# Altium PCB NBP8 Xilinx Virtex-II Pro BGA456 Rev1.01.PcbDoc (part 3 of 4)
Units mm, origin at the board's own origin, x right, y up, seen from the top; angles counter-clockwise.
Board outline 69 x 99.5 mm, 8 copper layers (Top Layer, InternalPlane1, InternalPlane2, MidLayer1, MidLayer2, MidLayer3, MidLayer4, Bottom Layer), stack 1.545 mm thick; 164 components, 314 nets, 1132 pads, 807 vias.
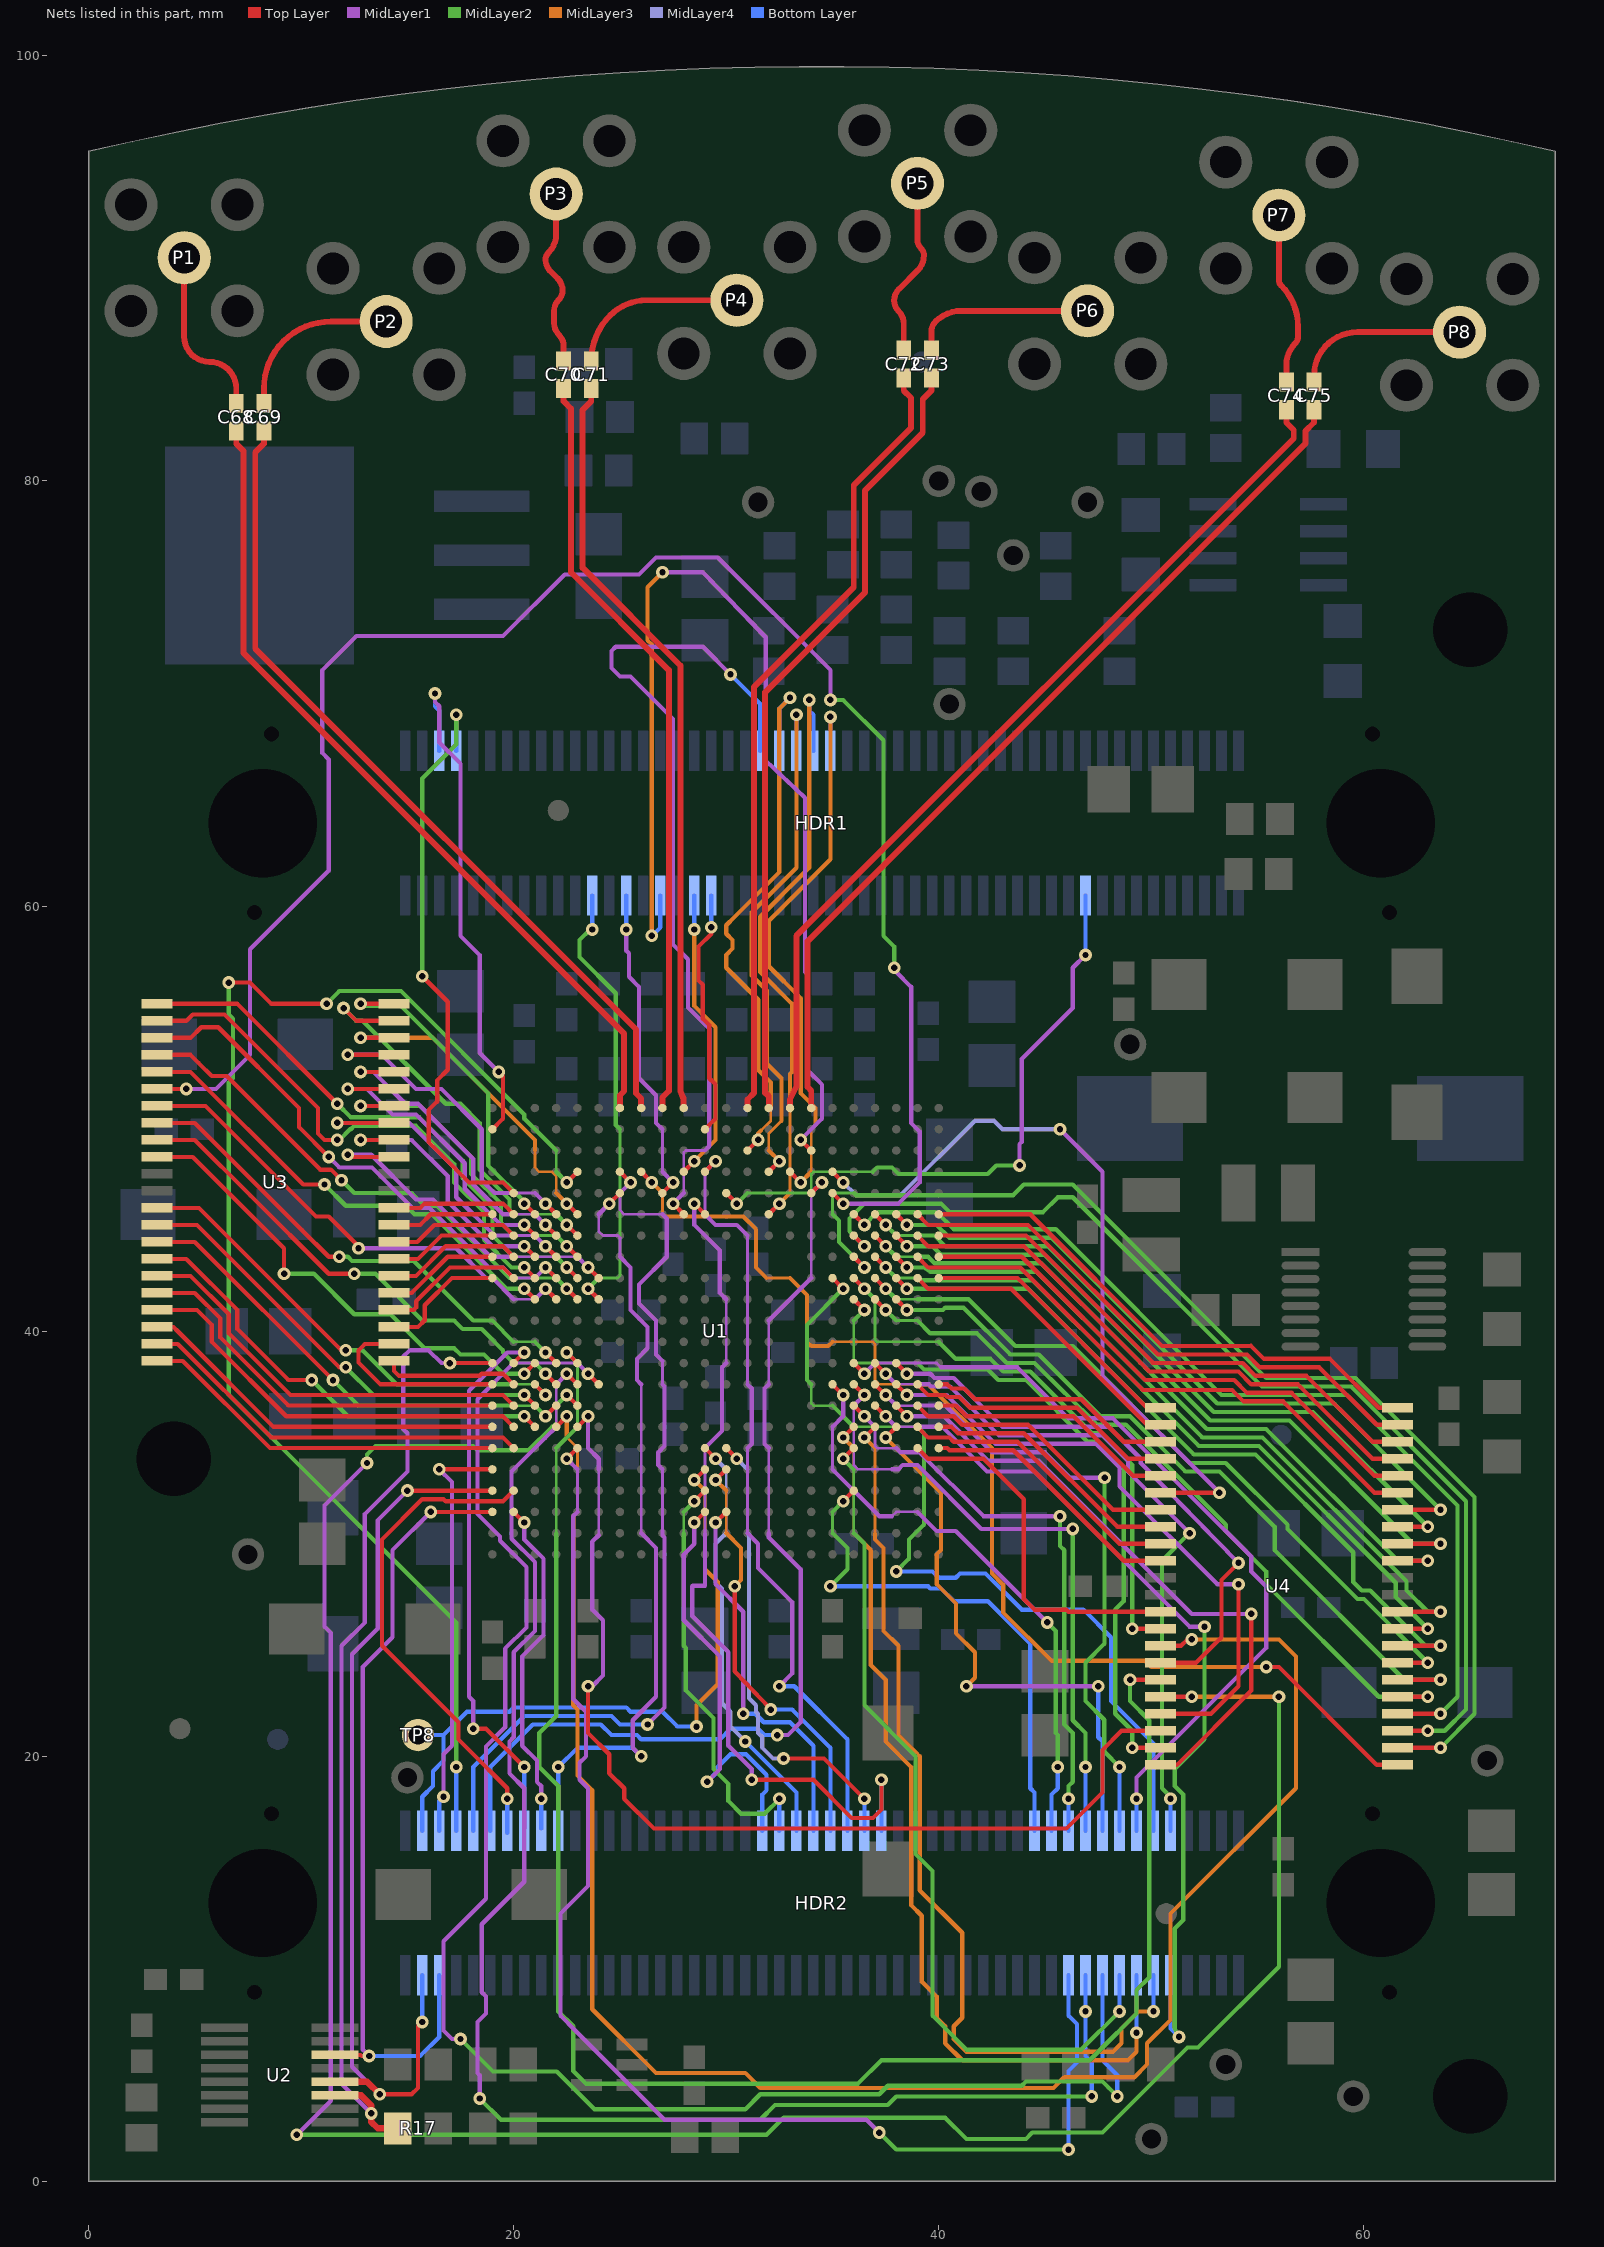
[diagram p9: the nets of this part, all layers, seen from the top]

## Via types
v1: diameter 0.6, hole 0.3, Top Layer to Bottom Layer, tented bottom, 695 vias
v2: diameter 0.9, hole 0.5, Top Layer to Bottom Layer, tented bottom, 45 vias
v3: diameter 1.8, hole 1, Top Layer to Bottom Layer, tented bottom, 26 vias
v4: diameter 1, hole 0.7, Top Layer to Bottom Layer, tented bottom, 17 vias
v5: diameter 1, hole 0.5, Top Layer to Bottom Layer, tented bottom, 15 vias
v6: diameter 1.5, hole 1, Top Layer to Bottom Layer, tented bottom, 4 vias
v7: diameter 0.8, hole 0.4, Top Layer to Bottom Layer, tented bottom, 3 vias
v8: diameter 0.9, hole 0.5, Top Layer to Bottom Layer, 2 vias

## Nets (pads, with @x,y where several pads share a name; then routed paths per layer and width w, separated by ;. In a path a pad name is that pad's centre, name@x,y a point inside that pad or via, vN(x,y) a via of type N, cw(c..) or ccw(c..) an arc to the next point about the centre after c; other vN are vias at no path point) (continued)
RAM_ADDR13: HDR1.35 U1.W13 | length 14
  Top Layer w0.2: U1.W13@28,47.5 v1(28.5,48)
  MidLayer3 w0.2: v1(28.5,48) 29.5,49 29.5,54.3 28.5,55.3 v1(28.5,58.9)
  Bottom Layer w0.2: v1(28.5,58.9) 28.5,59.1 HDR1.35@28.5,60.5
RAM_ADDR14: HDR1.31 U1.Y7 | length 51.6
  Top Layer w0.2: v1(33.5,49) U1.Y7@34,48.5
  MidLayer1 w0.2: v1(27,75.7) 28.9,75.7 31.855,72.645 31.855,66.845 33.7,65.1 33.7,56.9 33.8,56.8 33.8,52.3 34.5,51.6 34.5,50 v1(33.5,49)
  MidLayer3 w0.2: v1(26.5,58.6) 26.5,72.3 26.3,72.5 26.3,75 26.8,75.5 v1(27,75.7)
  Bottom Layer w0.2: v1(26.5,58.6) 26.9,59 HDR1.31@26.9,60.5
RAM_ADDR15: HDR1.27 U1.V14 | length 15.1
  Top Layer w0.2: U1.V14@27,46.5 v1(27.5,47)
  MidLayer1 w0.127: 27,47.5 27,49.5
  MidLayer1 w0.2: v1(25.3,58.9) 25.3,57.9 25.422,57.778 25.422,56.678 25.9,56.2 25.9,51.9 26.7,51.1 26.7,49.8 27,49.5 ; 27,47.5 v1(27.5,47)
  Bottom Layer w0.2: v1(25.3,58.9) HDR1.27@25.3,60.5
RAM_ADDR16: HDR1.23 U1.N17 | length 21.4
  Top Layer w0.2: v1(23.5,42) U1.N17@24,41.5
  MidLayer2 w0.127: 24,42.5 24.9,42.5 25,42.6 25,49.5
  MidLayer2 w0.2: v1(23.5,42) 24,42.5 ; v1(23.7,58.9) 23.6,58.9 23.1,58.4 23.1,57.6 24.8,55.9 24.8,49.7 25,49.5
  Bottom Layer w0.2: v1(23.7,58.9) HDR1.23@23.7,60.5
RAM_CS: HDR1.37 U1.AA12 | length 12
  Top Layer w0.2: U1.AA12@29,49.5 29.5,50 29.5,51.6 29.2,51.9 29.2,54.4 28.9,54.7 28.9,56.3 28.7,56.5 28.7,58.1 29.3,58.7 v1(29.3,59)
  Bottom Layer w0.2: v1@29.3,58.8 v1(29.3,59) HDR1.37@29.3,60.5
RED0: HDR1.6 U1.AA22 | length 24.8
  Top Layer w0.2: U1.AA22@19,49.5 19.5,50 19.5,52 v1(19.3,52.2)
  MidLayer1 w0.2: v1(16.3,70) 16.3,69.6 16.5,69.4 16.5,67.7 17.5,66.7 17.5,58.6 18.4,57.7 18.4,53.1 v1(19.3,52.2)
  Bottom Layer w0.2: v1(16.3,70) 16.3,69.4 16.5,69.2 HDR1.6@16.5,67.3
RED1: HDR1.8 U1.V21 | length 28.3
  Top Layer w0.2: v1(15.7,56.7) 16.9,55.5 16.9,52.3 16.4,51.8 16.4,50.8 16,50.4 16,48.9 17.9,47 19.5,47 U1.V21@20,46.5
  MidLayer2 w0.2: v1(15.7,56.7) 15.7,66 17.3,67.6 v1(17.3,69)
  Bottom Layer w0.2: HDR1.8@17.3,67.3 v1(17.3,69)
REF_CLK: HDR2.4 TP8.1 U1.E12 | length 32.1
  Top Layer w0.2: v1(28.5,33) U1.E12@29,33.5
  MidLayer3 w0.127: 29,30.5 29,32.5
  MidLayer3 w0.2: v1(28.5,33) 29,32.5 ; v1(28.6,21.4) 28.6,22.4 29.6,23.4 29.6,28.2 29,28.8 29,30.5
  Bottom Layer w0.2: TP8.1@15.5,21 16.7,21 ; HDR2.4@15.7,16.5 15.7,18.1 16.2,18.6 16.2,19.3 16.7,19.8 16.7,21 ; v1(28.6,21.4) 27.7,21.4 27,22.1 25.5,22.1 25.3,22.3 20,22.3 19.8,22.1 17.8,22.1 16.7,21
RX0N: C68.2 P1.1 | length 8.2
  Top Layer w0.279: P1.1@4.5,90.5 4.5,86.8 ccw(c5.7,86.8) 5.7,85.6 cw(c5.7,84.35) 6.95,84.35 C68.2@6.95,83.65
RX0P: C69.2 P2.1 | length 8.2
  Top Layer w0.279: C69.2@8.25,83.65 8.25,84.35 cw(c11.4,84.35) 11.4,87.5 P2.1@14,87.5
RX1N: C72.2 P5.1 | length 8.6
  Top Layer w0.279: C72.2@38.35,86.15 38.35,87.396 ccw(c37.496,87.396) 38.1,88 cw(c38.583,88.483) 37.9,88.483 cw(c38.666,88.483) 38.124,89.024 39.005,89.905 ccw(c38.293,90.617) 39.3,90.617 ccw(c38.859,90.617) 39.171,90.929 cw(c39.583,91.341) 39,91.341 P5.1@39,94
RX1P: C73.2 P6.1 | length 8.7
  Top Layer w0.279: C73.2@39.65,86.15 39.65,87.017 cw(c40.333,87.017) 39.85,87.5 cw(c41.057,86.293) 41.057,88 P6.1@47,88
SCL: HDR2.5 U1.C22 U2.14 | length 38.1
  Top Layer w0.2: U2.14@11.6,5.953 12.798,5.953 12.85,5.9 v1(13.2,5.9) ; v1(16.1,31.5) 16.9,31.5 U1.C22@19,31.5
  MidLayer1 w0.2: v1(13.2,5.9) 12.9,6.2 12.9,24.2 14.3,25.6 14.3,29.7 v1(16.1,31.5)
  Bottom Layer w0.2: v1(13.2,5.9) 15.6,5.9 16.5,6.8 HDR2.5@16.5,9.7
SDA: HDR2.3 U1.D22 U2.12 | length 43.7
  Top Layer w0.2: v1(13.7,4.1) 15.2,4.1 15.5,4.4 15.5,7.3 v1(15.7,7.5) ; v1(15,32.5) U1.D22@19,32.5
  Top Layer w0.3: U2.12@11.6,4.683 13.117,4.683 v1(13.7,4.1)
  MidLayer1 w0.2: v1(13.7,4.1) 12.4,5.4 12.4,24.8 13.6,26 13.6,31.1 v1(15,32.5)
  Bottom Layer w0.2: v1(15.7,7.5) HDR2.3@15.7,9.7
SP0: HDR2.79 U1.F18 | length 63.3
  Top Layer w0.2: v1(22.5,34) U1.F18@23,34.5
  MidLayer1 w0.127: 23,31.5 23,33.5
  MidLayer1 w0.2: v1(22.5,34) 23,33.5 ; 23,31.5 22.8,31.3 22.8,22.7 23.4,22.1 23.4,20 23.1,19.7 23.1,18.9 23.5,18.5 23.5,13.9 22.2,12.6 22.2,7.8 22.9,7.1 27.1,2.9 36.6,2.9 v1(37.2,2.3)
  MidLayer2 w0.2: v1(37.2,2.3) 38,1.5 v1(46.1,1.5)
  Bottom Layer w0.2: v1(46.1,1.5) 46.1,5.2 ; 46.1,5.2 46.5,5.6 46.5,7.4 46.1,7.8 HDR2.79@46.1,9.7
SP1: HDR2.81 U1.J18 | length 73.7
  Top Layer w0.2: v1(22.5,38) U1.J18@23,37.5
  MidLayer1 w0.127: 22,35.5 22,37.5
  MidLayer1 w0.2: v1(18.4,3.9) 18.4,5 18.3,5.1 18.3,7.5 18.7,7.9 18.7,8.7 18.5,8.9 18.5,12.1 20.5,14.1 20.5,18.5 19.8,19.2 19.8,20.7 20,20.9 20,24.9 21,25.9 21,29.134 19.9,30.234 19.9,33.4 21.493,34.993 22,35.5 ; 22,37.5 v1(22.5,38)
  MidLayer2 w0.2: v1(18.4,3.9) 19.4,2.9 31.6,2.9 32.3,3.6 37.6,3.6 38,4 v1(47.2,4)
  Bottom Layer w0.2: HDR2.81@46.9,9.7 v1(46.9,8) 46.9,5.9 47.2,5.6 v1(47.2,4)
SP2: HDR2.83 U1.J17 | length 79.1
  Top Layer w0.2: v1(23.5,38) U1.J17@24,37.5
  MidLayer1 w0.127: 20,38.5 23,38.5
  MidLayer1 w0.2: v1(17.5,6.7) 17.1,6.7 16.7,7.1 16.7,11.3 18.7,13.3 18.7,20.466 19.6,21.366 19.6,25.066 20.6,26.066 20.6,28.9 19.357,30.143 19.357,30.343 18.3,31.4 18.3,36.8 20,38.5 ; 23,38.5 v1(23.5,38)
  MidLayer2 w0.2: v1(17.5,6.7) 19.03,5.17 22.03,5.17 23.8,3.4 30.9,3.4 31.6,4.1 37.2,4.1 37.6,4.5 43.9,4.5 44.1,4.7 47.7,4.7 48,4.4 v1(48.4,4)
  Bottom Layer w0.2: HDR2.83@47.7,9.7 47.7,7 47.7,5.7 48.4,5 v1(48.4,4)
SP3: HDR2.85 U1.F5 | length 40.6
  Top Layer w0.2: v1(35.5,34) U1.F5@36,34.5
  MidLayer2 w0.127: 36,30.5 36,33.5
  MidLayer2 w0.2: v1(35.5,34) 36,33.5 ; 36,30.5 36.5,30 36.5,22.4 38.9,20 38.9,15.4 39.7,14.6 39.7,7.8 41.3,6.2 46.7,6.2 v1(48.5,8)
  Bottom Layer w0.2: v1(48.5,8) HDR2.85@48.5,9.7
SP4: HDR2.87 U1.G5 | length 44.3
  Top Layer w0.2: v1(35.5,35) U1.G5@36,35.5
  MidLayer3 w0.127: 36,30.5 36,34.5
  MidLayer3 w0.2: v1(35.5,35) 36,34.5 ; 36,30.5 36.8,29.7 36.8,24.3 37.502,23.598 37.502,20.698 38.7,19.5 38.7,13 39.2,12.5 39.2,12 39.2,9.4 39.9,8.7 39.9,7.7 40.3,7.3 40.3,6.5 41.1,5.7 48.9,5.7 49.3,6.1 v1(49.3,7)
  Bottom Layer w0.2: v1(49.3,7) HDR2.87@49.3,9.7
SP5: HDR2.89 U1.G4 | length 43.6
  Top Layer w0.2: v1(36.5,35) U1.G4@37,35.5
  MidLayer3 w0.127: 37,30.5 37,34.5
  MidLayer3 w0.2: v1(36.5,35) 37,34.5 ; 37,30.5 37,30.2 37.4,29.8 37.4,25.9 38.1,25.2 38.1,21 38.894,20.206 39.1,20 39.1,13.7 41.1,11.7 41.1,7.7 40.7,7.3 40.7,6.7 41.3,6.1 48.2,6.1 48.6,6.5 48.6,7.2 49.4,8 v1(50.1,8)
  Bottom Layer w0.2: v1(50.1,8) HDR2.89@50.1,9.7
SP6: HDR2.91 U1.H4 | length 43.1
  Top Layer w0.2: U1.H4@37,36.5 v1(37.5,36)
  MidLayer1 w0.127: 38,35.5 39,35.5
  MidLayer1 w0.2: v1(37.5,36) 38,35.5 ; 39,35.5 40.172,35.5 42.272,33.4 44.5,33.4 51.8,26.1 v1(52.5,26.1)
  MidLayer2 w0.2: v1(51.3,6.8) 51.1,7.2 51.1,11.9 51.5,12.3 51.5,18.2 51.1,18.6 51.1,19.4 52.5,20.8 v1(52.5,26.1)
  Bottom Layer w0.2: HDR2.91@50.9,9.7 50.9,7.2 v1(51.3,6.8)
SP7: HDR2.92 U1.K4 | length 33.1
  Top Layer w0.2: U1.K4@37,38.5 v1(37.5,38)
  MidLayer1 w0.127: 38,37.5 39,37.5
  MidLayer1 w0.2: v1(37.5,38) 38,37.5 ; 39,37.5 39.534,37.5 39.634,37.4 40.534,37.4 42.834,35.1 47.7,35.1 48.9,33.9 48.9,33.4 v1(51.8,30.5)
  MidLayer2 w0.2: v1(50.9,18) 50.9,18.1 50.5,18.5 50.5,29.2 v1(51.8,30.5)
  Bottom Layer w0.2: HDR2.92@50.9,16.5 v1(50.9,18)
SP8: HDR2.90 U1.P6 | length 41.3
  Top Layer w0.2: U1.P6@35,42.5 v1(35.5,42)
  MidLayer2 w0.127: 34,37.5 34,36.6 34.1,36.5 35,36.5 ; 36,35.5 39,35.5
  MidLayer2 w0.2: 34,37.5 33.8,37.7 33.8,40.3 v1(35.5,42) ; 35,36.5 36,35.5 ; v1(38,28.7) 38.6,29.3 38.6,30.2 39.3,30.9 39.3,35.2 39,35.5
  Bottom Layer w0.2: v1(38,28.7) 39.7,28.7 40,28.4 40.8,28.4 41,28.6 42.2,28.6 43.9,26.9 46.8,26.9 48.1,25.6 48.1,22.6 50.1,20.6 50.1,18.7 HDR2.90@50.1,16.5
SP9: HDR2.88 U1.K5 | length 38.6
  Top Layer w0.2: U1.K5@36,38.5 v1(36.5,38)
  MidLayer1 w0.127: 37,38.5 39.9,38.5 40.1,38.3
  MidLayer1 w0.2: v1(36.5,38) 37,38.5 ; 40.1,38.3 43.7,38.3 46.1,35.9 48.2,35.9 52.2,31.9 54.7,29.4 54.7,28.7 55.4,28 55.4,25.1 49.3,19 v1(49.3,18)
  Bottom Layer w0.2: HDR2.88@49.3,16.5 v1(49.3,18)
SP10: HDR2.86 U1.J4 | length 30.3
  Top Layer w0.2: U1.J4@37,37.5 v1(37.5,37)
  MidLayer1 w0.127: 38,36.5 39,36.5
  MidLayer1 w0.2: v1(37.5,37) 38,36.5 ; 39,36.5 40.303,36.5 42.503,34.3 45,34.3 46.2,33.1 v1(47.8,33.1)
  MidLayer2 w0.2: v1(47.8,33.1) 47.8,25.3 46.9,24.4 46.9,22.6 47.781,21.719 47.781,20.219 v1(48.5,19.5)
  Bottom Layer w0.2: HDR2.86@48.5,16.5 v1(48.5,19.5)
SP11: HDR2.84 U1.G3 | length 27.6
  Top Layer w0.2: v1(37.5,35) U1.G3@38,35.5
  MidLayer1 w0.2: v1(41.3,23.3) v1(47.5,23.3)
  MidLayer3 w0.2: v1(37.5,35) 39.4,33.1 40.1,32.4 40.1,29.7 39.9,29.5 39.9,28.1 40.1,27.9 40.814,27.186 40.814,25.786 41.7,24.9 41.7,23.7 v1(41.3,23.3)
  Bottom Layer w0.2: v1(47.5,23.3) 47.5,20.9 47.7,20.7 47.7,18 HDR2.84@47.7,16.5
SP12: HDR2.82 U1.J5 | length 30.4
  Top Layer w0.2: U1.J5@36,37.5 v1(36.5,37)
  MidLayer1 w0.127: 36,36.5 36,33.7 36.2,33.5 37.8,33.5
  MidLayer1 w0.2: 36,36.5 v1(36.5,37) ; 37.8,33.5 38.1,33.5 38.3,33.7 39,33.7 42,30.7 v1(46.3,30.7)
  MidLayer2 w0.2: v1(46.3,30.7) 46.3,21.7 46.9,21.1 v1(46.9,19.5)
  Bottom Layer w0.2: HDR2.82@46.9,16.5 v1(46.9,19.5)
SP13: HDR2.80 U1.H5 | length 27.5
  Top Layer w0.2: U1.H5@36,36.5 v1(36.5,36)
  MidLayer1 w0.127: 37,35.5 37,34.6 37.1,34.5 38,34.5
  MidLayer1 w0.2: v1(36.5,36) 37,35.5 ; 38,34.5 38.2,34.3 39.1,34.3 42.1,31.3 v1(45.7,31.3)
  MidLayer2 w0.2: v1(45.7,31.3) 45.7,29.9 45.9,29.7 45.9,21.5 46.3,21.1 46.3,18.8 46.1,18.6 v1(46.1,18)
  Bottom Layer w0.2: HDR2.80@46.1,16.5 v1(46.1,18)
SP14: HDR2.78 U1.J6 | length 27.8
  Top Layer w0.2: U1.J6@35,37.5 v1(35.5,37)
  MidLayer1 w0.127: 35,33.5 35,35.5 ; 37.8,31.3 38,31.5 39,31.5
  MidLayer1 w0.2: 35,33.5 37.2,31.3 37.8,31.3 ; 35,35.5 35.5,36 v1(35.5,37) ; 39,31.5 39.9,30.6 40.8,30.6 43.6,27.8 v1(45.1,26.3)
  MidLayer2 w0.2: v1(45.1,26.3) 45.5,25.9 45.5,21.1 45.6,21 v1(45.6,19.5)
  Bottom Layer w0.2: HDR2.78@45.3,16.5 45.3,18.2 45.6,18.5 v1(45.6,19.5)
SP15: HDR2.76 U1.D5 | length 24.9
  Top Layer w0.2: v1(35.5,32) U1.D5@36,32.5
  MidLayer2 w0.127: 35,30.5 35,31.5
  MidLayer2 w0.2: v1(34.9,28) 35.7,28.8 35.7,29.8 35,30.5 ; 35,31.5 v1(35.5,32)
  Bottom Layer w0.2: v1(34.9,28) 39.5,28 39.6,27.9 40.1,27.9 40.7,27.3 42.3,27.3 44.3,25.3 44.3,18.5 44.5,18.3 HDR2.76@44.5,16.5
SPI_CLK: HDR1.46 U1.Y10 | length 26.8
  Top Layer w0.2: U1.Y10@31,48.5 v1(31.5,49)
  MidLayer3 w0.127: 31.637,49.437 32.1,49.9 32.1,50.5
  MidLayer3 w0.2: v1(31.5,49) 31.5,49.3 31.637,49.437 ; 32.1,50.5 32.1,51.7 31.506,52.294 31.506,55.594 30,57.1 30,57.7 30.3,58 30.3,58.4 30,58.7 30,59.1 30.386,59.486 32.5,61.6 32.5,69.3 v1(33,69.8)
  Bottom Layer w0.2: HDR1.46@32.5,67.3 32.5,69.3 v1(33,69.8)
SPI_DIN: HDR1.44 U1.U13 | length 40.5
  Top Layer w0.2: v1(27.5,46) U1.U13@28,45.5
  MidLayer1 w0.127: 28,46.5 28,48.4 28.1,48.5 29,48.5
  MidLayer1 w0.2: v1(27.5,46) 28,46.5 ; 29,48.5 29.2,48.7 29.2,54.234 28.2,55.234 28.2,57.5 27.5,58.2 27.5,68.8 25.5,70.8 25,70.8 24.6,71.2 24.6,72 24.8,72.2 28.9,72.2 v1(30.2,70.9)
  Bottom Layer w0.2: v1(30.2,70.9) 30.7,70.4 31.6,69.5 HDR1.44@31.6,67.3
SPI_DOUT: HDR1.50 U1.U9 | length 28.7
  Top Layer w0.2: U1.U9@32,45.5 v1(32.5,46)
  MidLayer3 w0.127: 33,46.5 33,50.5
  MidLayer3 w0.2: v1(32.5,46) 33,46.5 ; 33,50.5 33,52.1 33.1,52.2 33.1,55.4 31.6,56.9 31.6,59.5 33.5,61.4 33.9,61.8 v1(33.9,69.7)
  Bottom Layer w0.2: v1(33.9,69.7) 33.9,69.2 34.1,69 HDR1.50@34.1,67.3
SPI_MODE: HDR1.52 U1.W8 | length 26.7
  Top Layer w0.2: U1.W8@33,47.5 v1(33.5,47)
  MidLayer3 w0.127: 34,47.5 34,49.5
  MidLayer3 w0.2: v1(33.5,47) 34,47.5 ; 34,49.5 34.2,49.7 34.2,50.5 33.5,51.2 33.5,55.669 32,57.169 32,59.3 34.9,62.2 v1(34.9,68.9)
  Bottom Layer w0.2: HDR1.52@34.9,67.3 v1(34.9,68.9) v1@34.9,69
SPI_SEL: HDR1.48 U1.W9 | length 25.3
  Top Layer w0.2: U1.W9@32,47.5 v1(32.5,48)
  MidLayer3 w0.127: 32,48.5 32,49.3 32.6,49.9
  MidLayer3 w0.2: 32,48.5 v1(32.5,48) ; 32.6,49.9 32.6,51.9 31.906,52.594 31.906,56.028 31.2,56.734 31.2,59.7 33.3,61.8 v1(33.3,69)
  Bottom Layer w0.2: HDR1.48@33.3,67.3 v1(33.3,69)
SRAM0_A0: U1.N20 U3.5 | length 22.2
  Top Layer w0.2: U3.5@3.225,52.2 4.8,52.2 10.1,46.9 v1(11.1,46.9) ; v1(20.5,42) U1.N20@21,41.5
  MidLayer2 w0.2: v1(11.1,46.9) 12.1,45.9 14.934,45.9 15.334,45.5 16.166,45.5 19.666,42 v1(20.5,42)
SRAM0_A1: U1.N18 U3.4 | length 24.5
  Top Layer w0.2: U3.4@3.225,53 4.8,53 5.2,52.6 5.799,52.001 6.499,52.001 10.9,47.6 11.4,47.6 v1(11.9,47.1) ; v1(22.5,42) U1.N18@23,41.5
  MidLayer2 w0.127: 19.8,42.5 22,42.5
  MidLayer2 w0.2: v1(11.9,47.1) 12.5,46.5 15.2,46.5 15.8,45.9 16.4,45.9 19.8,42.5 ; 22,42.5 v1(22.5,42)
SRAM0_A2: U1.P19 U3.3 | length 24.8
  Top Layer w0.2: U3.3@3.225,53.8 3.9,53.8 4.8,53.8 5.3,54.3 6.1,54.3 9.9,50.5 9.9,49.6 v1(11.3,48.2) ; v1(21.5,43) U1.P19@22,42.5
  MidLayer1 w0.127: 20,42.5 21,42.5
  MidLayer1 w0.2: v1(11.3,48.2) 11.8,47.7 13.334,47.7 15.234,45.8 16.034,45.8 18.834,43 19.5,43 20,42.5 ; 21,42.5 v1(21.5,43)
SRAM0_A3: U1.P20 U3.2 | length 25.6
  Top Layer w0.2: U3.2@3.225,54.6 4.6,54.6 4.9,54.9 6.4,54.9 10.8,50.5 10.8,49.3 11.1,49 v1(11.7,49) ; v1(20.5,43) U1.P20@21,42.5
  MidLayer2 w0.2: v1(11.7,49) 11.8,49 12.3,49.5 12.334,49.5 12.495,49.66 15.408,49.66 17.2,47.869 17.2,47 18.6,45.6 18.6,44.3 19.9,43 v1(20.5,43)
SRAM0_A4: U1.P18 U3.1 | length 26.4
  Top Layer w0.2: U3.1@3.225,55.4 7,55.4 v1(11.7,50.7) ; v1(22.5,43) U1.P18@23,42.5
  MidLayer2 w0.127: 20,43.5 22,43.5
  MidLayer2 w0.2: v1(11.7,50.7) 12.34,50.06 15.574,50.06 17.6,48.034 17.6,47.2 19,45.8 19,44.5 20,43.5 ; 22,43.5 v1(22.5,43)
SRAM0_A5: U1.U20 U3.44 | length 15.9
  Top Layer w0.2: v1(12.8,55.4) U3.44@14.375,55.4 ; v1(20.5,46) U1.U20@21,45.5
  MidLayer2 w0.2: v1(12.8,55.4) 12.9,55.3 14.7,55.3 18.8,51.2 18.8,47.8 20.5,46.1 v1(20.5,46)
SRAM0_A6: U1.T18 U3.43 | length 19.6
  Top Layer w0.2: v1(12,55.2) 12.6,54.6 U3.43@14.375,54.6 ; v1(22.5,45) U1.T18@23,44.5
  MidLayer2 w0.127: 20,45.5 22,45.5
  MidLayer2 w0.2: v1(12,55.2) 12.6,54.6 12.9,54.6 16.802,50.698 17.502,50.698 18.4,49.8 18.4,47.6 19.8,46.2 19.8,45.7 20,45.5 ; 22,45.5 v1(22.5,45)
SRAM0_A7: U1.U18 U3.42 | length 16.4
  Top Layer w0.2: v1(12.8,53.8) U3.42@14.375,53.8 ; v1(22.5,46) U1.U18@23,45.5
  MidLayer3 w0.127: 21,48.5 21,47.7 21.2,47.5 21.8,47.5 22,47.3 22,46.5
  MidLayer3 w0.2: v1(12.8,53.8) 16.2,53.8 21,49 21,48.5 ; 22,46.5 v1(22.5,46)
SRAM0_A8: U1.H22 U3.18 | length 18.5
  Top Layer w0.2: U3.18@3.225,41.8 5,41.8 6.2,40.6 6.2,39.7 9.4,36.5 U1.H22@19,36.5
SRAM0_A9: U1.R22 U3.27 | length 5.3
  Top Layer w0.2: U3.27@14.375,41.8 15.2,41.8 16.9,43.5 U1.R22@19,43.5
SRAM0_A10: U1.P21 U3.26 | length 6.8
  Top Layer w0.2: U3.26@14.375,41 15.3,41 15.413,41.113 15.413,41.413 17,43 19.5,43 U1.P21@20,42.5
SRAM0_A11: U1.P22 U3.25 | length 6
  Top Layer w0.2: U3.25@14.375,40.2 15.5,40.2 15.819,40.519 15.819,41.219 17.1,42.5 U1.P22@19,42.5
SRAM0_A12: U1.J22 U3.24 | length 9.1
  Top Layer w0.2: U3.24@14.375,39.4 13,39.4 12.7,39.1 12.7,38.531 13.731,37.5 U1.J22@19,37.5
SRAM0_A13: U1.J21 U3.23 | length 6.4
  Top Layer w0.2: U3.23@14.375,38.6 14.375,38.125 14.6,37.9 18.4,37.9 18.5,38 19.5,38 U1.J21@20,37.5
SRAM0_A14: U1.F22 U3.22 | length 17.5
  Top Layer w0.2: U3.22@3.225,38.6 4.434,38.6 8.534,34.5 U1.F22@19,34.5
SRAM0_A15: U1.F21 U3.21 | length 18.8
  Top Layer w0.2: U3.21@3.225,39.4 4.2,39.4 8.6,35 19.5,35 U1.F21@20,34.5
SRAM0_A16: U1.G22 U3.20 | length 17.7
  Top Layer w0.2: U3.20@3.225,40.2 4,40.2 4.2,40 4.6,39.6 8.7,35.5 U1.G22@19,35.5
SRAM0_A17: U1.G21 U3.19 | length 19.5
  Top Layer w0.2: U3.19@3.225,41 5.1,41 5.8,40.3 5.8,39.5 9.3,36 19.5,36 U1.G21@20,35.5
SRAM0_A18: U1.R21 U3.28 | length 6.4
  Top Layer w0.2: U3.28@14.375,42.6 15.4,42.6 16.8,44 19.5,44 U1.R21@20,43.5
SRAM0_D0: U1.N19 U3.7 | length 23.3
  Top Layer w0.2: U3.7@2.9,50.6 U3.7@3.225,50.6 5.5,50.6 10.7,45.4 11.3,45.4 12.7,44 v1(12.7,43.9) ; v1(21.5,42) U1.N19@22,41.5
  MidLayer1 w0.127: 20,41.5 21,41.5
  MidLayer1 w0.2: v1(12.7,43.9) 17.3,43.9 18.7,42.5 19,42.5 20,41.5 ; 21,41.5 v1(21.5,42)
SRAM0_D1: U1.K19 U3.8 | length 23.5
  Top Layer w0.2: U3.8@3.225,49.8 5,49.8 10.025,44.775 11.3,43.5 v1(11.8,43.5) ; v1(21.5,39) U1.K19@22,38.5
  MidLayer2 w0.127: 20,39.5 21,39.5
  MidLayer2 w0.2: v1(11.8,43.5) 12.2,43.5 12.4,43.3 15.3,43.3 18.1,40.5 19,40.5 20,39.5 ; 21,39.5 v1(21.5,39)
SRAM0_D2: U1.J19 U3.9 | length 23.6
  Top Layer w0.2: U3.9@3.225,49 5,49 7.6,46.4 11.3,42.7 v1(12.5,42.7) ; v1(21.5,38) U1.J19@22,37.5
  MidLayer2 w0.127: 20,38.5 21,38.5
  MidLayer2 w0.2: v1(12.5,42.7) 13.5,42.7 15.7,40.5 17.2,40.5 17.6,40.1 18.5,40.1 19.5,39.1 19.5,39 20,38.5 ; 21,38.5 v1(21.5,38)
SRAM0_D3: U1.K20 U3.10 | length 22.9
  Top Layer w0.2: U3.10@3.225,48.2 4.9,48.2 5.7,47.4 9.2,43.9 v1(9.2,42.7) ; v1(20.5,38) U1.K20@21,38.5
  MidLayer2 w0.2: v1(9.2,42.7) 10.6,42.7 12.5,40.8 14.2,40.8 15.8,39.2 17.2,39.2 17.5,38.9 18.6,38.9 19.5,38 v1(20.5,38)
SRAM0_D4: U1.J20 U3.13 | length 22.6
  Top Layer w0.2: U3.13@3.225,45.8 5.2,45.8 11.9,39.1 v1(12.1,39.1) ; U1.J20@21,37.5 v1(21.5,37)
  MidLayer2 w0.127: 20,37.5 21,37.5
  MidLayer2 w0.2: v1(12.1,39.1) 12.9,39.1 14.5,37.5 20,37.5 ; 21,37.5 v1(21.5,37)
SRAM0_D5: U1.H20 U3.14 | length 21.3
  Top Layer w0.2: U3.14@3.225,45 5.1,45 11.8,38.3 v1(12.1,38.3) ; v1(20.5,37) U1.H20@21,36.5
  MidLayer2 w0.2: v1(12.1,38.3) 13.4,37 v1(20.5,37)
SRAM0_D6: U1.H19 U3.15 | length 22.4
  Top Layer w0.2: U3.15@3.225,44.2 5,44.2 v1(11.5,37.7) ; v1(21.5,36) U1.H19@22,36.5
  MidLayer2 w0.127: 20,36.5 21,36.5
  MidLayer2 w0.2: v1(11.5,37.7) 12.7,36.5 20,36.5 ; 21,36.5 v1(21.5,36)
SRAM0_D7: U1.G20 U3.16 | length 21.6
  Top Layer w0.2: U3.16@3.225,43.4 4.6,43.4 7,41 7,40.1 9.4,37.7 v1(10.5,37.7) ; v1(20.5,36) U1.G20@21,35.5
  MidLayer2 w0.2: v1(10.5,37.7) 12.2,36 v1(20.5,36)
SRAM0_D8: U1.T22 U3.29 | length 5.1
  Top Layer w0.2: U3.29@14.375,43.4 15.5,43.4 16.6,44.5 U1.T22@19,44.5
SRAM0_D9: U1.T21 U3.30 | length 6.2
  Top Layer w0.2: U3.30@14.375,44.2 15.466,44.2 16.266,45 19.5,45 U1.T21@20,44.5
SRAM0_D10: U1.U22 U3.31 | length 4.8
  Top Layer w0.2: U3.31@14.375,45 15.6,45 16.1,45.5 U1.U22@19,45.5
SRAM0_D11: U1.U21 U3.32 | length 5.9
  Top Layer w0.2: U3.32@14.375,45.8 15.6,45.8 15.8,46 19.5,46 U1.U21@20,45.5
SRAM0_D12: U1.P17 U3.35 | length 16.5
  Top Layer w0.2: v1(12.2,48.3) 12.2,48.2 U3.35@14.375,48.2 ; v1(23.5,43) U1.P17@24,42.5
  MidLayer1 w0.127: 20,43.5 23,43.5
  MidLayer1 w0.2: v1(12.2,48.3) 13.3,48.3 15.4,46.2 16.2,46.2 18.9,43.5 20,43.5 ; 23,43.5 v1(23.5,43)
SRAM0_D13: U1.R20 U3.36 | length 12.8
  Top Layer w0.2: v1(12.8,49) U3.36@14.375,49 ; v1(20.5,44) U1.R20@21,43.5
  MidLayer1 w0.2: v1(12.8,49) 15.2,49 16.9,47.3 16.9,46.1 19,44 v1(20.5,44)
SRAM0_D14: U1.R19 U3.37 | length 16.3
  Top Layer w0.2: v1(11.7,49.8) 12.2,49.8 U3.37@14.375,49.8 ; v1(21.5,44) U1.R19@22,43.5
  MidLayer1 w0.127: 20,44.5 21,44.5
  MidLayer1 w0.2: v1(11.7,49.8) 15.1,49.8 17.3,47.6 17.3,46.3 19.1,44.5 20,44.5 ; 21,44.5 v1(21.5,44)
SRAM0_D15: U1.R18 U3.38 | length 15.7
  Top Layer w0.2: v1(12.8,50.6) U3.38@14.375,50.6 ; v1(22.5,44) U1.R18@23,43.5
  MidLayer2 w0.127: 20,44.5 22,44.5
  MidLayer2 w0.2: v1(12.8,50.6) 15.6,50.6 18,48.2 18,47.4 19.4,46 19.4,45.1 20,44.5 ; 22,44.5 v1(22.5,44)
SRAM0_E: U1.V6 U3.6 | length 83.8
  Top Layer w0.2: U3.6@3.225,51.4 v1(4.6,51.4) ; U1.V6@35,46.5 v1(35.5,46)
  MidLayer1 w0.2: v1(4.6,51.4) 6,51.4 7.6,53 7.6,57.966 11.3,61.666 11.3,66.9 11,67.2 11,71.1 12.6,72.7 19.5,72.7 22.4,75.6 25.9,75.6 26.7,76.4 29.6,76.4 34.9,71.1 v1(34.9,69.7) ; v1(35.5,46) 38.1,46 39.1,47 39.1,49.4 38.7,49.8 38.7,56.2 v1@38,56.9
  MidLayer2 w0.2: v1(34.9,69.7) 35.5,69.7 37.4,67.8 37.4,58.6 37.9,58.1 v1(37.9,57.1)
SRAM0_LB: U1.T20 U3.39 | length 14.5
  Top Layer w0.2: v1(12.2,51.4) U3.39@14.375,51.4 ; v1(20.5,45) U1.T20@21,44.5
  MidLayer1 w0.2: v1(12.2,51.4) 13.1,51.4 14.3,50.2 15.4,50.2 17.7,47.9 17.7,46.7 19.4,45 v1(20.5,45)
SRAM0_OE: U1.U19 U3.41 | length 16.5
  Top Layer w0.2: v1(12.2,53) U3.41@14.375,53 ; v1(21.5,46) U1.U19@22,45.5
  MidLayer1 w0.127: 20,46.5 21,46.5
  MidLayer1 w0.2: v1(12.2,53) 13.8,53 15.401,51.399 16.601,51.399 18.5,49.5 18.5,47.1 19.1,46.5 20,46.5 ; 21,46.5 v1(21.5,46)
SRAM0_UB: U1.T19 U3.40 | length 14.7
  Top Layer w0.2: v1(12.8,52.2) U3.40@14.375,52.2 ; v1(21.5,45) U1.T19@22,44.5
  MidLayer1 w0.127: 20,45.5 21,45.5
  MidLayer1 w0.2: v1(12.8,52.2) 13.4,52.2 14.9,50.7 15.5,50.7 18.1,48.1 18.1,46.9 19.5,45.5 20,45.5 ; 21,45.5 v1(21.5,45)
SRAM0_W: U1.H21 U3.17 | length 19.8
  Top Layer w0.2: U3.17@3.225,42.6 4.8,42.6 6.6,40.8 6.6,39.9 9.5,37 19.5,37 U1.H21@20,36.5
SRAM1_A0: U1.H1 U4.5 | length 11.8
  Top Layer w0.2: U1.H1@40,36.5 40.5,36.5 40.8,36.5 41.3,36 46.1,36 46.334,36 49.134,33.2 U4.5@50.425,33.2
SRAM1_A1: U1.J2 U4.4 | length 12.9
  Top Layer w0.2: U1.J2@39,37.5 39.5,37 40.3,37 40.4,36.9 40.966,36.9 41.466,36.4 46.5,36.4 48.9,34 U4.4@50.425,34
SRAM1_A2: U1.J1 U4.3 | length 11.6
  Top Layer w0.2: U1.J1@40,37.5 40.4,37.5 ; 40.3,37.5 40.4,37.5 ; U4.3@50.425,34.8 48.7,34.8 46.7,36.8 41.7,36.8 41.2,37.3 40.6,37.3 40.4,37.5
SRAM1_A3: U1.P2 U4.2 | length 14.3
  Top Layer w0.2: U1.P2@39,42.5 39.5,42 43.4,42 49.8,35.6 U4.2@50.425,35.6
SRAM1_A4: U1.P1 U4.1 | length 13
  Top Layer w0.2: U1.P1@40,42.5 43.7,42.5 49.8,36.4 U4.1@50.425,36.4
SRAM1_A5: U1.U1 U4.44 | length 25.4
  Top Layer w0.2: U1.U1@40,45.5 44.3,45.5 50.5,39.3 54.69,39.31 55.3,38.7 58.4,38.7 60.7,36.4 U4.44@61.575,36.4 U4.44@61.6,36.4
SRAM1_A6: U1.U2 U4.43 | length 26.8
  Top Layer w0.2: U1.U2@39,45.6 U1.U2@39,45.5 39.5,45 44.2,45 50.3,38.9 54.5,38.9 55.1,38.3 57.9,38.3 60.6,35.6 U4.43@61.575,35.6
SRAM1_A7: U1.T1 U4.42 | length 25.6
  Top Layer w0.2: U1.T1@40,44.5 44.1,44.5 50.1,38.5 ; 50.067,38.5 50.1,38.5 ; U4.42@61.575,34.8 60.4,34.8 57.3,37.9 54.9,37.9 54.3,38.5 50.1,38.5
SRAM1_A8: U1.H18 U4.18 | length 114.1
  Top Layer w0.2: v1(22.5,37) U1.H18@23,36.5 ; U4.18@50.425,22.8 v1(51.9,22.8)
  MidLayer1 w0.2: v1(9.8,2.2) 11.4,3.8 11.4,25.8 11.1,26.1 11.1,31.8 v1(13.1,33.8)
  MidLayer2 w0.127: 21.8,35.5 22,35.7 22,36.5
  MidLayer2 w0.2: v1(9.8,2.2) 31.9,2.2 32.7,3 40.3,3 41.3,2 44.1,2 44.4,2.3 47.7,2.3 51.7,6.3 52.2,6.3 56,10.1 v1(56,22.8) ; v1(13.1,33.8) 13.1,34.2 13.5,34.6 18.1,34.6 18.3,34.4 20.7,34.4 21.8,35.5 ; 22,36.5 v1(22.5,37)
  MidLayer3 w0.2: v1(51.9,22.8) v1(56,22.8)
SRAM1_A9: U1.N4 U4.27 | length 35.7
  Top Layer w0.2: U1.N4@37,41.5 v1(37.5,41) ; U4.27@61.6,22.8 v1(63,22.8)
  MidLayer2 w0.127: 38,40.5 39,40.5
  MidLayer2 w0.2: v1(37.5,41) 38,40.5 ; 39,40.5 39.6,39.9 41.8,39.9 43.2,38.5 44.5,38.5 47.434,35.6 48.8,35.6 51.2,33.2 53.5,30.9 53.5,30.6 55.4,28.7 55.4,28.1 60.7,22.8 v1(63,22.8)
SRAM1_A10: U1.U5 U4.26 | length 46.7
  Top Layer w0.2: U1.U5@36,45.5 v1(36.5,45) ; U4.26@61.6,22 v1(63.6,22)
  MidLayer2 w0.2: v1(36.5,45) 37.1,45.6 39.9,45.6 40.7,44.8 45.5,44.8 53.3,37 59.2,37 64.4,31.8 64.4,22.8 v1(63.6,22)
SRAM1_A11: U1.T5 U4.25 | length 51.4
  Top Layer w0.2: U1.T5@36,44.5 v1(36.5,44) ; U4.25@61.6,21.2 v1(63,21.2)
  MidLayer2 w0.2: v1(36.5,44) 35.8,44.7 35.8,45.3 36.5,46 40.1,46 40.5,45.6 44.9,45.6 45.6,46.3 46.3,46.3 55.2,37.4 59.4,37.4 64.8,32 64.8,22.2 63.8,21.2 v1(63,21.2)
SRAM1_A12: U1.R5 U4.24 | length 55.8
  Top Layer w0.2: U1.R5@36,43.5 v1(36.5,43) ; U4.24@61.6,20.4 v1(63.6,20.4)
  MidLayer2 w0.127: 35,45.5 35,46.4 35.1,46.5 36,46.5
  MidLayer2 w0.2: 35,45.5 35.3,45.2 35.3,44.2 v1(36.5,43) ; 36,46.5 36.1,46.4 43.5,46.4 44,46.9 46.3,46.9 55.4,37.8 59.6,37.8 65.2,32.2 65.2,22 v1(63.6,20.4)
SRAM1_A13: U1.W15 U4.23 | length 55.4
  Top Layer w0.2: U1.W15@26,47.5 v1(26.5,47) ; v1(55.4,24.2) 56,24.2 60.6,19.6 U4.23@61.575,19.6
  MidLayer3 w0.127: 27,45.5 27,46.5 ; 31.9,42.5 33,42.5 ; 35,39.5 36.9,39.5 37,39.4 37,37.7 37.2,37.5 39,37.5
  MidLayer3 w0.2: v1(26.5,47) 27,46.5 ; 27,45.5 27.1,45.4 30.8,45.4 31.4,44.8 31.4,43 31.9,42.5 ; 33,42.5 33.8,41.7 33.8,39.5 34,39.3 34.8,39.3 35,39.5 ; 39,37.5 39.5,37.5 42.5,34.5 42.5,28.6 43.028,28.072 43.028,26.772 45.3,24.5 49.7,24.5 50,24.2 v1(55.4,24.2)
SRAM1_A14: U1.H3 U4.22 | length 30.1
  Top Layer w0.2: U1.H3@38,36.5 v1(38.5,36) ; U4.22@50.4,19.6 U4.22@50.425,19.6 51.2,19.6 54.7,23.1 v1(54.7,26.7)
  MidLayer1 w0.2: v1(38.5,36) 40.237,36 42.337,33.9 44.7,33.9 51.9,26.7 v1(54.7,26.7)
SRAM1_A15: U1.N5 U4.21 | length 33.1
  Top Layer w0.2: U1.N5@36,41.5 v1(36.5,41) ; v1(49.1,20.4) U4.21@50.425,20.4 U4.21@50.5,20.4
  MidLayer2 w0.127: 36,40.5 36,38.6 36.1,38.5 39,38.5
  MidLayer2 w0.2: 36,40.5 v1(36.5,41) ; 39,38.5 39.3,38.2 42.3,38.2 42.8,37.7 44.1,37.7 47,34.8 47.4,34.8 48.7,33.5 48.7,27.3 48.3,26.9 48.3,22 49.1,21.2 v1(49.1,20.4)
SRAM1_A16: U1.G18 U4.20 | length 49.4
  Top Layer w0.2: U1.G18@23,35.5 v1(23.5,36) ; v1(23.5,23.3) 23.5,21.1 24.5,20.1 24.5,19.2 25.2,18.5 25.2,18 26.6,16.6 46,16.6 47.7,18.3 47.7,20.3 48.6,21.2 U4.20@50.425,21.2
  MidLayer1 w0.127: 24,30.4 24,33.5
  MidLayer1 w0.2: v1(23.5,23.3) v1@23.7,23.3 ; v1(23.5,36) 23.5,34.5 24,34 24,33.5 ; v1@23.6,23.2 v1@23.7,23.3 ; 24,30.4 23.7,30.1 23.7,26.9 24.2,26.4 24.2,23.8 v1@23.7,23.3
SRAM1_A17: U1.J3 U4.19 | length 29.6
  Top Layer w0.2: U1.J3@38,37.5 v1(38.5,37) ; U4.19@50.4,22 U4.19@50.425,22 52.8,22 54.1,23.3 v1(54.1,28.1)
  MidLayer1 w0.2: v1(38.5,37) 40.369,37 42.669,34.7 47.4,34.7 48.5,33.6 48.5,32.7 53.1,28.1 v1(54.1,28.1)
SRAM1_A18: U1.N3 U4.28 | length 35.7
  Top Layer w0.2: U1.N3@38,41.5 v1(38.5,41) ; U4.28@61.6,23.6 v1(63.6,23.6)
  MidLayer2 w0.2: v1(38.5,41) 40.2,41 40.3,41.1 41.166,41.1 43.366,38.9 44.7,38.9 47.6,36 49,36 51.6,33.4 53.2,33.4 55.8,30.8 55.8,29.7 61.9,23.6 v1(63.6,23.6)
SRAM1_D0: U1.H2 U4.7 | length 13.5
  Top Layer w0.2: U1.H2@39,36.5 39.5,36 40.7,36 41.1,35.6 44.2,35.6 48.2,31.6 U4.7@50.425,31.6
SRAM1_D1: U1.G1 U4.8 | length 12.4
  Top Layer w0.2: U1.G1@40,35.5 40.4,35.5 40.6,35.5 40.9,35.2 44,35.2 48.4,30.8 U4.8@50.425,30.8
SRAM1_D2: U1.G2 U4.9 | length 13.7
  Top Layer w0.2: U1.G2@39,35.5 39.5,35 40.5,35 40.7,34.8 43.7,34.8 48.5,30 U4.9@50.425,30
SRAM1_D3: U1.F1 U4.10 | length 12.6
  Top Layer w0.2: U1.F1@40,34.5 40.4,34.5 40.5,34.4 43.5,34.4 48.7,29.2 U4.10@50.425,29.2
SRAM1_D4: U1.F2 U4.13 | length 17.4
  Top Layer w0.2: U1.F2@39,34.5 39.5,34 42.1,34 44,32.1 44,27.4 44.5,26.9 46,26.9 46.1,26.8 U4.13@50.425,26.8
SRAM1_D5: U1.P5 U4.14 | length 26.9
  Top Layer w0.2: U1.P5@36,42.5 v1(36.5,42) ; v1(49.1,26) U4.14@50.4,26
  MidLayer2 w0.127: 37,41.5 37,39.6 37.1,39.5 40,39.5
  MidLayer2 w0.2: v1(36.5,42) 37,41.5 ; 40,39.5 40.8,38.7 42.434,38.7 43.034,38.1 44.3,38.1 47.2,35.2 47.6,35.2 49.1,33.7 v1(49.1,26)
SRAM1_D6: U1.G19 U4.15 | length 86.3
  Top Layer w0.2: U1.G19@22,35.5 v1(22.5,36) ; U4.15@50.425,25.2 51.4,25.2 51.7,25.5 v1(51.9,25.5)
  MidLayer3 w0.127: 22.5,35 23,34.5 23,31.5
  MidLayer3 w0.2: 22.5,35 v1(22.5,36) ; 23,31.5 22.8,31.3 22.8,22.4 23,22.2 23,19.1 23.285,18.815 23.7,18.4 23.7,8.1 26.7,5.1 30.9,5.1 31.6,4.4 45.4,4.4 45.9,4.9 49.2,4.9 49.8,5.5 49.8,6.5 50.9,7.6 50.9,12.6 56.8,18.5 56.8,24.7 56,25.5 v1(51.9,25.5)
SRAM1_D7: U1.K3 U4.16 | length 27.4
  Top Layer w0.2: U1.K3@38,38.5 v1(38.5,38) ; U4.16@50.4,24.4 U4.16@50.425,24.4 52.1,24.4 53.3,25.6 53.3,28.3 v1(54.1,29.1)
  MidLayer1 w0.2: v1(38.5,38) 39.6,38 39.8,37.8 40.7,37.8 43,35.5 48,35.5 49.5,34 49.5,33.8 v1(54.1,29.1)
SRAM1_D8: U1.P4 U4.29 | length 35
  Top Layer w0.2: U1.P4@37,42.5 v1(37.5,42) ; U4.29@61.6,24.4 v1(63,24.4)
  MidLayer2 w0.127: 38,41.5 39,41.5
  MidLayer2 w0.2: v1(37.5,42) 38,41.5 ; 39,41.5 41.4,41.5 43.433,39.467 43.6,39.3 46.3,39.3 51.8,33.8 53.5,33.8 56.4,30.9 56.4,30.7 59.7,27.4 60,27.4 v1(63,24.4)
SRAM1_D9: U1.P3 U4.30 | length 35.6
  Top Layer w0.2: U1.P3@38,42.5 v1(38.5,42) ; U4.30@61.6,25.2 v1(63.6,25.2)
  MidLayer2 w0.2: v1(38.5,42) 44.2,42 52,34.2 54.903,34.2 59.5,29.603 59.5,28.2 59.9,27.8 60.3,27.8 62.9,25.2 v1(63.6,25.2)
SRAM1_D10: U1.R4 U4.31 | length 35
  Top Layer w0.2: U1.R4@37,43.5 v1(37.5,43) ; U4.31@61.6,26 v1(63,26)
  MidLayer2 w0.127: 38,42.5 39,42.5
  MidLayer2 w0.2: v1(37.5,43) 38,42.5 ; 39,42.5 39.1,42.4 44.4,42.4 52.234,34.6 55.069,34.6 61.5,28.169 61.5,27.5 v1(63,26)
SRAM1_D11: U1.R3 U4.32 | length 34.7
  Top Layer w0.2: U1.R3@38,43.5 v1(38.5,43) ; U4.32@61.6,26.8 v1(63.6,26.8)
  MidLayer2 w0.2: v1(38.5,43) 39.3,43 39.6,42.8 44.6,42.8 52.4,35 55.234,35 62,28.234 62,27.8 63,26.8 v1(63.6,26.8)
SRAM1_D12: U1.T4 U4.35 | length 33.7
  Top Layer w0.2: U1.T4@37,44.5 v1(37.5,44) ; U4.35@61.6,29.2 v1(63,29.2)
  MidLayer2 w0.127: 38,43.5 39,43.5
  MidLayer2 w0.2: v1(37.5,44) 38,43.5 ; 39,43.5 39.5,43.5 39.8,43.2 44.8,43.2 52.603,35.4 55.4,35.4 61.6,29.2 v1(63,29.2)
SRAM1_D13: U1.T3 U4.36 | length 33.6
  Top Layer w0.2: U1.T3@38,44.5 v1(38.5,44) ; U4.36@61.6,30 v1(63.6,30)
  MidLayer2 w0.2: v1(38.5,44) 39.3,44 39.7,44 40.1,43.6 44.969,43.6 52.769,35.8 56.5,35.8 62.3,30 v1(63.6,30)
SRAM1_D14: U1.U4 U4.37 | length 33.5
  Top Layer w0.2: U1.U4@37,45.5 v1(37.5,45) ; U4.37@61.6,30.8 v1(63,30.8)
  MidLayer2 w0.127: 38,44.5 39,44.5
  MidLayer2 w0.2: v1(37.5,45) 38,44.5 ; 39,44.5 39.8,44.5 40.3,44 45.134,44 52.934,36.2 57.6,36.2 v1(63,30.8)
SRAM1_D15: U1.U3 U4.38 | length 33.5
  Top Layer w0.2: U1.U3@38,45.5 v1(38.5,45) ; U4.38@61.5,31.6 U4.38@61.575,31.6 v1(63.6,31.6)
  MidLayer2 w0.2: v1(38.5,45) 39.9,45 40.5,44.4 45.3,44.4 53.1,36.6 58.6,36.6 v1(63.6,31.6)
SRAM1_E: U1.W6 U4.6 | length 35.8
  Top Layer w0.2: U1.W6@35,47.5 v1(35.5,47) ; U4.6@50.425,32.4 v1(53.2,32.4)
  MidLayer1 w0.2: v1(45.7,49.5) 47.7,47.5 47.7,37.9 v1(53.2,32.4)
  MidLayer4 w0.2: v1(35.5,47) 36.1,46.4 38.2,46.4 41.7,49.9 42.6,49.9 43,49.5 v1(45.7,49.5)
SRAM1_LB: U1.R2 U4.39 | length 27.2
  Top Layer w0.2: U1.R2@39,43.5 39.5,43 43.834,43 49.6,37.234 53.8,37.234 54.334,36.7 56.2,36.7 60.5,32.4 U4.39@61.575,32.4
SRAM1_OE: U1.T2 U4.41 | length 27.1
  Top Layer w0.2: U1.T2@39,44.5 39.5,44 44.003,44 49.481,38.522 49.9,38.1 54.1,38.1 54.7,37.5 56.9,37.5 60.4,34 U4.41@61.575,34 U4.41@61.7,34
SRAM1_UB: U1.R1 U4.40 | length 25.8
  Top Layer w0.2: U1.R1@40,43.5 43.9,43.5 49.7,37.7 53.9,37.7 54.5,37.1 56.6,37.1 60.5,33.2 U4.40@61.575,33.2
SRAM1_W: U1.K18 U4.17 | length 82
  Top Layer w0.2: v1(22.5,39) U1.K18@23,38.5 ; v1(49,23.6) U4.17@50.425,23.6
  MidLayer2 w0.127: 22,30.5 22,34.5 ; 23,35.5 23,38.5
  MidLayer2 w0.2: 22,30.5 22,21.9 21.2,21.1 21.2,19.5 22.1,18.6 22.1,8 22.8,7.3 22.8,5.2 23.4,4.6 36.203,4.6 36.203,4.603 37.3,5.7 47.1,5.7 47.546,6.146 49.3,7.9 49.3,9 49.9,9.6 49.9,21.7 49,22.6 v1(49,23.6) ; 22,34.5 23,35.5 ; v1(22.5,39) 23,38.5
SW0: HDR2.44 U1.C12 | length 20.6
  Top Layer w0.2: v1(28.5,31) U1.C12@29,31.5
  MidLayer1 w0.2: v1(28.5,31) 28.5,30 28,29.5 28,26.4 29.7,24.7 29.7,19.4 v1(29.1,18.8)
  Bottom Layer w0.2: v1(29.1,18.8) 29.6,19.3 29.6,19.5 30.2,20.1 30.934,20.1 31.9,19.134 31.9,18.4 31.7,18.2 HDR2.44@31.7,16.5
SW1: HDR2.46 U1.D12 | length 20.3
  Top Layer w0.2: v1(28.5,32) U1.D12@29,32.5
  MidLayer2 w0.127: 28,30.5 28,31.5
  MidLayer2 w0.2: 28,30.5 28,25.2 28.1,25.1 28.1,23.1 29.4,21.8 29.4,19.4 30.1,18.7 30.1,17.9 30.7,17.3 31.8,17.3 v1(32.5,18) ; 28,31.5 v1(28.5,32)
  Bottom Layer w0.2: HDR2.46@32.5,16.5 v1(32.5,18)
SW2: HDR2.48 U1.F12 | length 20.2
  Top Layer w0.2: U1.F12@29,34.5 v1(29.5,34)
  MidLayer4 w0.127: 30,30.5 30,33.5
  MidLayer4 w0.2: v1(29.5,34) 30,33.5 ; 30,30.5 29.5,30 29.5,28.2 29.8,27.9 29.8,22.5 30.2,22.1 30.2,21.4 v1(30.9,20.7)
  Bottom Layer w0.2: v1(30.9,20.7) 33.3,18.3 HDR2.48@33.3,16.5
SW3: HDR2.50 U1.C11 | length 18.2
  Top Layer w0.2: v1(29.5,31) U1.C11@30,31.5
  MidLayer1 w0.2: v1(29.5,31) 29.5,28.1 30.8,26.8 v1(30.8,22)
  Bottom Layer w0.2: v1(30.8,22) 31.366,22 31.766,21.6 33,21.6 34.1,20.5 34.1,18 HDR2.50@34.1,16.5
SW4: HDR2.52 U1.E11 | length 20.2
  Top Layer w0.2: v1(29.5,33) U1.E11@30,33.5 ; v1(30.4,28) 30.4,24 v1(32.1,22.2)
  MidLayer3 w0.127: 30,30.5 30,32.5
  MidLayer3 w0.2: v1(29.5,33) 30,32.5 ; 30,30.5 30.7,29.8 30.7,28.3 v1(30.4,28)
  Bottom Layer w0.2: v1(32.1,22.2) 33.1,22.2 34.9,20.4 34.9,18 HDR2.52@34.9,16.5
SW5: HDR2.54 U1.W12 | length 36.8
  Top Layer w0.2: U1.W12@29,47.5 v1(29.5,48)
  MidLayer1 w0.127: 29,45.5 29,47.5 ; 31,30.5 31,34.5 ; 31,37.5 31,44.5
  MidLayer1 w0.2: 29,45.5 29.5,45 30.5,45 31,44.5 ; 29,47.5 v1(29.5,48) ; 31,30.5 31.5,30 31.5,28.866 33.1,27.266 33.1,23.9 v1(32.5,23.3) ; 31,34.5 31.2,34.7 31.2,37.3 31,37.5
  Bottom Layer w0.2: v1(32.5,23.3) 33.2,23.3 35.7,20.8 35.7,19.5 HDR2.54@35.7,16.5
SW6: HDR2.56 U1.F11 | length 22.1
  Top Layer w0.2: U1.F11@30,34.5 v1(30.5,34) ; v1(32.7,19.9) 34.6,19.9 v1(36.5,18)
  MidLayer4 w0.127: 31,30.5 31,33.5
  MidLayer4 w0.2: v1(30.5,34) 31,33.5 ; 31,30.5 31.067,30.433 31.067,22.733 31.4,22.4 31.4,22.1 31.5,22 31.5,21.1 31.7,20.9 31.7,20.4 32.2,19.9 v1(32.7,19.9)
  Bottom Layer w0.2: HDR2.56@36.5,16.5 v1(36.5,18)
SW7: HDR2.58 U1.U12 | length 41.4
  Top Layer w0.2: v1(28.5,46) U1.U12@29,45.5 ; v1(31.2,18.9) 34.1,18.9 35.9,17.1 36.9,17.1 37.3,17.5 v1(37.3,18.9)
  MidLayer1 w0.127: 29,30.5 29,34.5 ; 30,38.5 30,41.5
  MidLayer1 w0.2: v1(28.5,46) 28.5,45 29.7,43.8 29.7,41.8 30,41.5 ; 29,30.5 29,28.027 28.427,28.027 28.4,28 28.4,26.6 30.1,24.9 30.1,20.5 31.2,19.4 v1(31.2,18.9) ; 29,34.5 29.8,35.3 29.8,38.3 30,38.5
  Bottom Layer w0.2: HDR2.58@37.3,16.5 v1(37.3,18.9)
SWC0: HDR2.18 U1.C21 | length 16.3
  Top Layer w0.2: U1.C21@20,31.5 v1(20.5,31)
  MidLayer1 w0.2: v1(20.5,31) 20.5,30.2 21.4,29.3 21.4,25.7 20.4,24.7 20.4,20.5 21.1,19.8 21.1,18.8 21.3,18.6 v1(21.3,18)
  Bottom Layer w0.2: HDR2.18@21.3,16.6 v1(21.3,18)
SWC1: HDR2.16 U1.K21 | length 26.1
  Top Layer w0.2: v1(18.1,21.3) 18.7,21.3 v1(20.5,19.5) ; U1.K21@20,38.5 v1(20.5,39)
  MidLayer1 w0.2: v1(18.1,21.3) 18.1,22.6 17.9,22.8 17.9,37.2 19.7,39 v1(20.5,39)
  Bottom Layer w0.2: HDR2.16@20.5,16.6 v1(20.5,19.5)
SWC2: HDR2.14 U1.D21 | length 23.5
  Top Layer w0.2: v1(19.7,18) 19.7,18.5 17.9,20.3 17.4,20.8 17.4,21.6 13.8,25.2 13.8,30.2 15.7,32.1 16.7,32.1 16.8,32 19.5,32 U1.D21@20,32.5
  Bottom Layer w0.2: HDR2.14@19.7,16.4 HDR2.14@19.7,16.5 v1(19.7,18)
SWC3: HDR2.6 U1.E22 | length 20
  Top Layer w0.2: v1(16.5,33.5) U1.E22@19,33.5
  MidLayer1 w0.2: v1(16.5,33.5) 17.1,32.9 17.1,20.5 16.7,20.1 v1(16.7,18.1)
  Bottom Layer w0.2: HDR2.6@16.5,16.5 16.5,17.9 v1(16.7,18.1)
SWR0: HDR2.20 U1.V16 | length 36.8
  Top Layer w0.2: v1(24.5,46) U1.V16@25,46.5
  MidLayer1 w0.127: 24,45.5 24,44.7 24.2,44.5 24.9,44.5 25,44.4 25,43.5 ; 26,30.5 26,37.5
  MidLayer1 w0.2: 24,45.5 v1(24.5,46) ; 25,43.5 25.5,43 25.5,41 26.3,40.2 26.3,39.2 25.8,38.7 25.8,37.7 26,37.5 ; v1(26,20) 25.6,20.4 25.6,21.7 26.7,22.8 26.7,29.8 26,30.5
  Bottom Layer w0.2: HDR2.20@22.1,16.6 v1(22.1,19.5) 23,20.4 25.6,20.4 v1(26,20)
SWR1: HDR2.12 U1.V7 | length 47.2
  Top Layer w0.2: U1.V7@34,46.5 v1(34.5,47)
  MidLayer1 w0.127: 32,30.5 32,34.5 ; 32,37.5 32,40.5 ; 34,42.5 34,46.5
  MidLayer1 w0.2: 32,30.5 32,30.3 33.5,28.8 33.5,21.6 32.9,21 v1(32.4,21) ; 32,34.5 31.8,34.7 31.8,37.3 32,37.5 ; 32,40.5 34,42.5 ; 34,46.5 v1(34.5,47)
  Bottom Layer w0.2: HDR2.12@18.9,16.5 18.9,19.5 20.9,21.5 24.1,21.5 24.6,21 25.8,21 26,20.8 29.7,20.8 30.2,21.3 31.5,21.3 31.8,21 v1(32.4,21)
SWR2: HDR2.10 U1.W16 | length 42.4
  Top Layer w0.2: U1.W16@25,47.5 v1(25.5,47)
  MidLayer1 w0.127: 25,46.5 25,45.7 25.2,45.5 27,45.5 ; 27,30.6 27,33.5 ; 27,37.5 27,38.6
  MidLayer1 w0.2: 25,46.5 v1(25.5,47) ; v1(26.3,21.5) 27.1,22.3 27.1,30.3 27,30.4 27,30.6 ; 27,33.5 26.8,33.7 26.8,34.3 27.1,34.6 27.1,37.4 27,37.5 ; 27,38.6 26.7,38.9 26.7,40.5 25.9,41.3 25.9,42.2 27.2,43.5 27.2,45.3 27,45.5
  Bottom Layer w0.2: HDR2.10@18.1,16.5 18.1,18 18.1,19.5 20.5,21.9 24.6,21.9 25,21.5 v1(26.3,21.5)
SWR3: HDR2.8 U1.W18 | length 66.2
  Top Layer w0.2: v1(6.6,56.4) 7.6,56.4 8.6,55.4 v1(11.2,55.4) ; v1(22.5,47) U1.W18@23,47.5
  MidLayer2 w0.127: 22,47.5 22,48.5
  MidLayer2 w0.2: v1(6.6,56.4) 6.6,54.9 6.8,54.7 6.8,51.9 6.6,51.7 6.6,37 17.3,26.3 v1(17.3,19.5) ; v1(11.2,55.4) 11.8,56 14.7,56 20.5,50.2 20.5,50 22,48.5 ; 22,47.5 v1(22.5,47)
  Bottom Layer w0.2: HDR2.8@17.3,16.5 v1(17.3,19.5)
TEMP_ALERT: R17.2 U1.K22 U2.11 | length 46.2
  Top Layer w0.2: v1(17,38.5) U1.K22@19,38.5
  Top Layer w0.3: U2.11@11.6,4.048 12.828,4.048 13.3,3.575 v1(13.3,3.2) 13.3,2.8 13.6,2.5 R17.2@14.55,2.5
  MidLayer1 w0.2: v1(13.3,3.2) 11.9,4.6 11.9,25.2 13,26.3 13,31.4 15,33.4 15,35.2 14.8,35.4 14.8,38.8 15.1,39.1 16,39.1 16.6,38.5 v1(17,38.5)
TEST: HDR1.81 U1.V11 | length 29.5
  Top Layer w0.2: U1.V11@30,46.5 v1(30.5,46)
  MidLayer1 w0.2: v1(43.8,47.8) 43.8,48.8 43.9,48.9 43.9,52.8 46.3,55.2 46.3,57.1 v1(46.9,57.7)
  MidLayer2 w0.127: 31,46.5 33.9,46.5 34,46.6 34,47.4 34.1,47.5 36.9,47.5 36.906,47.506
  MidLayer2 w0.2: v1(30.5,46) 31,46.5 ; 36.906,47.506 37.1,47.7 37.8,47.7 38.1,47.4 42.3,47.4 42.7,47.8 v1(43.8,47.8)
  Bottom Layer w0.2: v1(46.9,57.7) HDR1.81@46.9,60.5
TX0N: C71.2 P4.1 | length 8.5
  Top Layer w0.279: C71.2@23.65,85.65 cw(c26.668,85.65) 24.534,87.784 cw(c26.263,86.055) 26.263,88.5 P4.1@30.5,88.5
TX0P: C70.2 P3.1 | length 8.5
  Top Layer w0.279: P3.1@22,93.5 22,91.607 cw(c20.776,91.607) 21.641,90.741 ccw(c21.983,90.4) 21.5,90.4 ccw(c22.224,90.4) 21.712,89.888 22.064,89.536 cw(c21.493,88.966) 22.3,88.966 cw(c21.659,88.966) 22.112,88.512 ccw(c22.624,88) 21.9,88 21.9,87.436 ccw(c22.712,87.436) 22.138,86.862 cw(c21.626,86.35) 22.35,86.35 C70.2@22.35,85.65
TX1N: C75.2 P8.1 | length 8.3
  Top Layer w0.279: C75.2@57.65,84.65 57.65,84.951 cw(c59.699,84.951) 59.699,87 P8.1@64.5,87
TX1P: C74.2 P7.1 | length 8.2
  Top Layer w0.279: P7.1@56,92.5 56,89.441 ccw(c56.341,89.441) 56.1,89.2 cw(c54.169,87.269) 56.9,87.269 56.9,86.8 cw(c56.417,86.8) 56.759,86.459 ccw(c57.745,85.472) 56.35,85.472 C74.2@56.35,84.65
V_RX0N: C68.1 U1.AB16 | length 39.5
  Top Layer w0.279: C68.1@6.95,82.35 6.95,81.75 7.3,81.4 7.3,71.9 25.2,54 25.2,51.3 25,51.1 U1.AB16@25,50.5
V_RX0P: C69.1 U1.AB15 | length 39.5
  Top Layer w0.279: C69.1@8.25,82.35 8.25,81.75 7.844,81.344 7.844,72.111 25.756,54.199 25.756,51.194 26,50.95 U1.AB15@26,50.5
V_RX1N: C72.1 U1.AB10 | length 37.7
  Top Layer w0.279: U1.AB10@31,50.5 31,50.9 31.3,51.2 31.3,70.3 36,75 36,79.8 38.7,82.5 38.7,83.9 38.35,84.25 C72.1@38.35,84.85
V_RX1P: C73.1 U1.AB9 | length 37.7
  Top Layer w0.279: U1.AB9@32,50.5 32,51.047 31.833,51.214 31.833,70.06 36.533,74.76 36.533,79.561 39.244,82.271 39.244,83.844 39.65,84.25 C73.1@39.65,84.85
V_TX0N: C71.1 U1.AB13 | length 36
  Top Layer w0.279: C71.1@23.65,84.35 23.65,83.75 23.244,83.344 23.244,75.911 27.838,71.316 27.838,51.308 27.991,50.927 27.991,50.5 U1.AB13@27.991,50.495
V_TX0P: C70.1 U1.AB14 | length 36
  Top Layer w0.279: C70.1@22.35,84.35 22.35,83.75 22.7,83.4 22.7,75.7 27.3,71.1 27.3,51.3 27,51 U1.AB14@27,50.5
V_TX1N: C75.1 U1.AB7 | length 42.8
  Top Layer w0.279: U1.AB7@34,50.5 34,51.32 33.833,51.486 33.833,58.344 57.244,81.755 57.244,82.344 57.65,82.75 C75.1@57.65,83.35
V_TX1P: C74.1 U1.AB8 | length 42.8
  Top Layer w0.279: U1.AB8@33,50.5 33,50.9 33.3,51.5 33.3,58.6 56.7,82 56.7,82.4 56.35,82.75 C74.1@56.35,83.35